# Altium PCB PCB1.PcbDoc
Units mm, origin at the board's own origin, x right, y up, seen from the top; angles counter-clockwise.
Board outline 93 x 20 mm, 2 copper layers (Top Layer, Bottom Layer); 36 components, 24 nets, 129 pads, 151 vias.
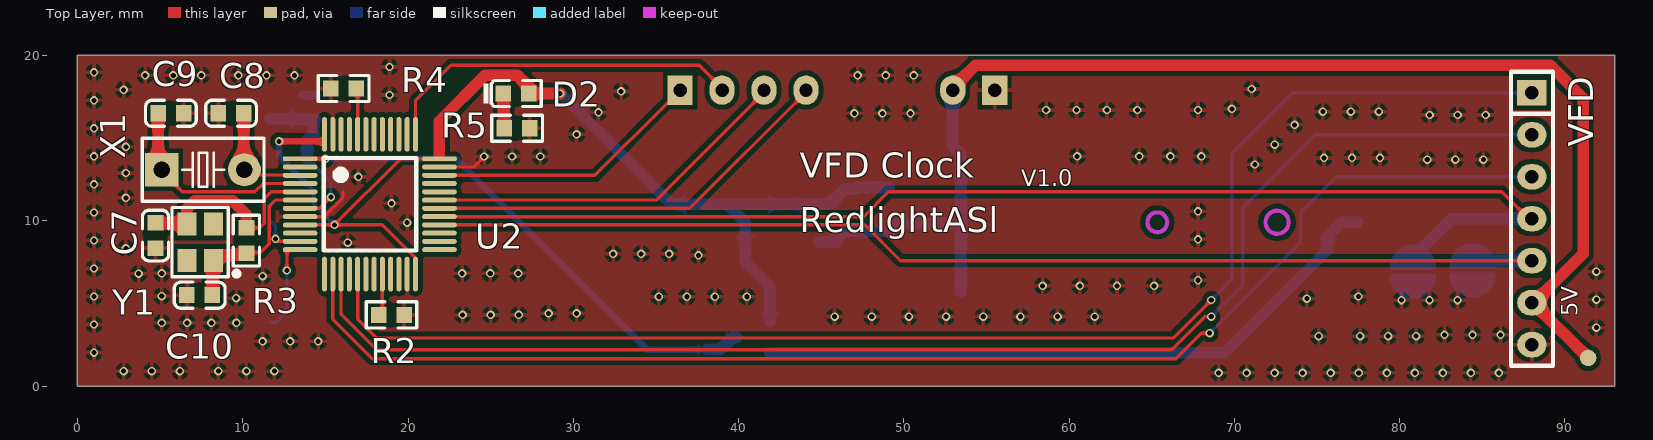
[diagram p0: Top Layer view]
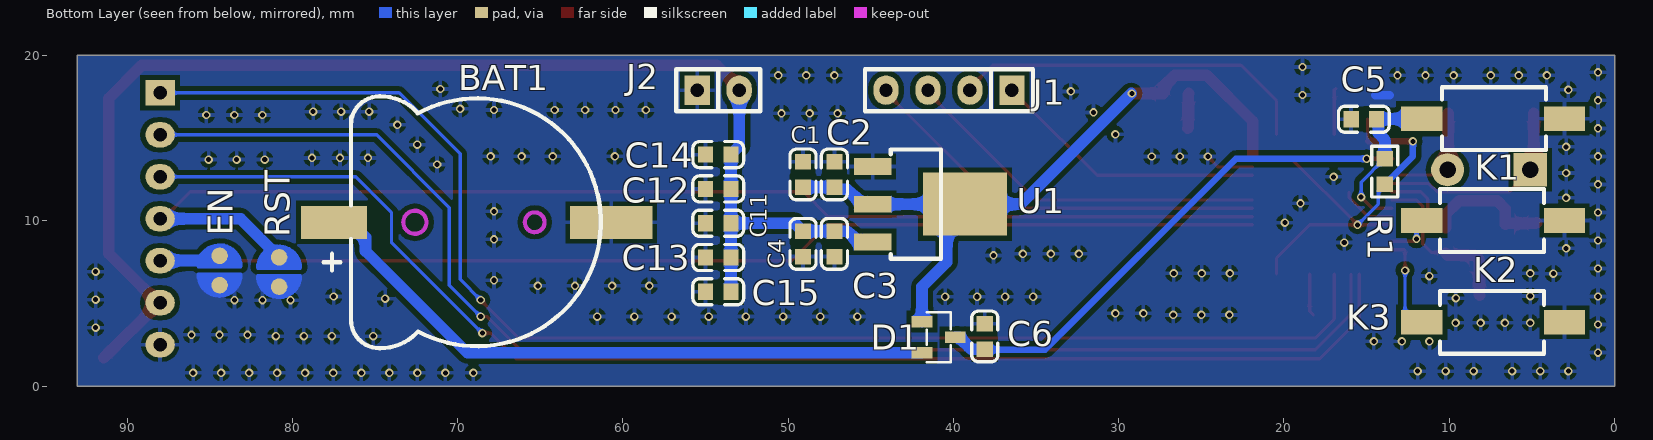
[diagram p1: Bottom Layer view, seen from below]
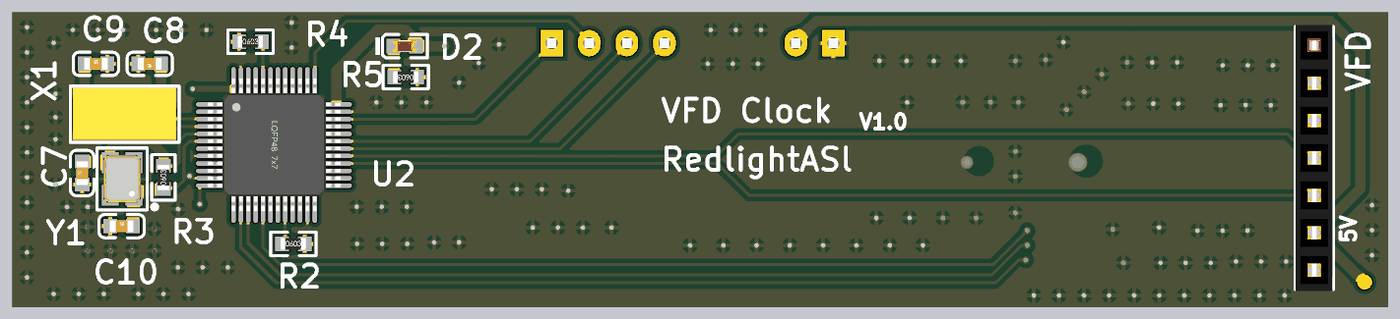
[diagram p2: 3D render of the assembled board from above, using the file's embedded part models]
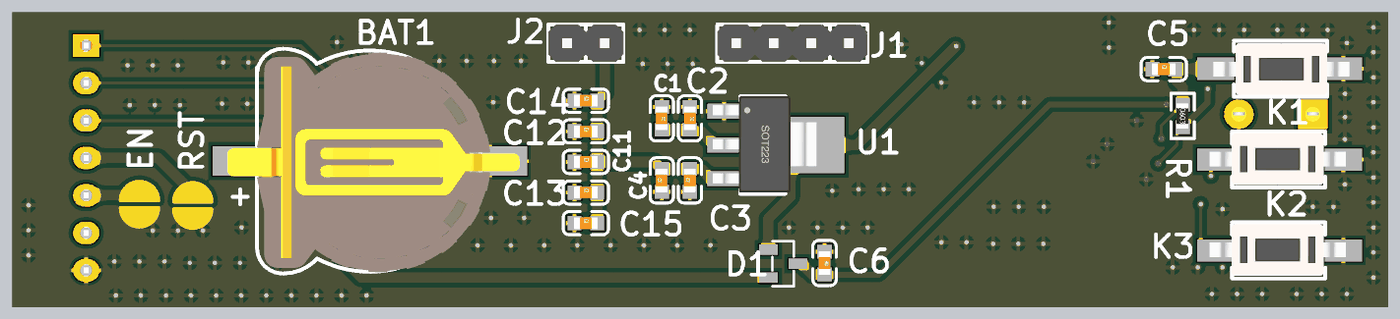
[diagram p3: 3D render of the assembled board from below, using the file's embedded part models]

## Layer stack, top to bottom
Top Solder: solder mask 0.0102, Solder Resist, Dk 3.5
Top Layer: signal copper 0.0356
Dielectric 1: dielectric 0.32, FR-4, Dk 4.8
Bottom Layer: signal copper 0.0356
Bottom Solder: solder mask 0.0102, Solder Resist, Dk 3.5

## Board outline
0,0 0,20 93,20 93,0

## Design rules (kind name [scope] priority, off if disabled: settings)
Clearance [All] p1: gap=0 ignorepadtopadclearanceinfootprint=FALSE except(0.3: Arc-Fill Arc-Poly Arc-Region Track-Fill Track-Poly Track-Region SMDPad-Fill SMDPad-Poly SMDPad-Region THPad-Fill THPad-Poly THPad-Region Via-Fill Via-Poly Via-Region Fill-Fill Fill-Poly Fill-Region Poly-Poly Poly-Region Region-Region)
PolygonConnect [All] p1: connectstyle=Relief reliefconductorwidth=0.254 reliefentries=4 polygonreliefangle="90 Angle" airgapwidth=0.254
RoutingVias [All] p1: holewidth=0.711 width=1.27 viastyle="Through Hole" minholewidth=0.711 minwidth=1.27 maxholewidth=0.711 maxwidth=1.27
SolderMaskExpansion [All] p1: expansion=0.102
Width [All] p1: maxlimit=40 minlimit=0.1 preferedwidth=0.2
30 further rules are at their usual default settings.

## Components (designator, comment, footprint, x,y, rotation, side; value= is the part's Value field where it differs from the comment)
5V "5V" "TEST 1" 91.4,1.7 r90 top (schematic designator TP1)
BAT1 "CR1220" CR1220-A 77.47,9.906 r0 bottom
C1 "100nF (104) 10% 50V" 0603_C 49.1,12.8 r270 bottom
C2 "10uF (106) 10% 10V" 0603_C 47.2,12.8 r270 bottom
C3 "10uF (106) 10% 10V" 0603_C 47.2,8.6 r90 bottom
C4 "100nF (104) 10% 50V" 0603_C 49.1,8.6 r90 bottom
C5 "100nF (104) 10% 50V" 0603_C 15.17,16.144 r180 bottom
C6 "100nF (104) 10% 50V" 0603_C 38.1,3 r270 bottom
C7 "22pF (220) 5% 50V" 0603_C 4.723,9.1 r90 top
C8 "15pF (150) 5% 50V" 0603_C 9.293,16.5 r180 top
C9 "15pF (150) 5% 50V" 0603_C 5.653,16.5 r0 top
C10 "22pF (220) 5% 50V" 0603_C 7.393,5.5 r0 top
C11 "1uF (105) 10% 50V" 0603_C 54.23,9.85 r180 bottom
C12 "1uF (105) 10% 50V" 0603_C 54.23,11.925 r180 bottom
C13 "1uF (105) 10% 50V" 0603_C 54.23,7.775 r180 bottom
C14 "1uF (105) 10% 50V" 0603_C 54.23,14 r180 bottom
C15 "1uF (105) 10% 50V" 0603_C 54.23,5.7 r180 bottom
D1 "BAT54C-KL3" BAT54C_KL3 39.9,2.95 r0 bottom
D2 "白灯 0603" 0603_LED_S1 26.53,17.7 r0 top
EN "DEBUG PAD" DEBUG_A#1 84.4,6.989 r90 bottom (schematic designator DE1)
J1 "Pin HDR1X4" "Pin HDR1X4/2.54mm-S" 36.46,17.9 r270 bottom
J2 "Pin HDR1X2" "Pin HDR1X2/2.54mm-S" 55.5,17.9 r90 bottom
K1 "KEY" SMD-3X6X5 3.032,16.172 r0 bottom
K2 "KEY" SMD-3X6X5 11.668,10.012 r180 bottom
K3 "KEY" SMD-3X6X5 11.668,3.853 r180 bottom
R1 "10KΩ (1002) ±1%" 0603_R 13.9,12.97 r270 bottom
R2 "10KΩ (1002) ±1%" 0603_R 19,4.3 r0 top
R3 "1MΩ (1004) ±1%" 0603_R 10.223,8.8 r90 top
R4 "10KΩ (1002) ±1%" 0603_R 16.1,18 r0 top
R5 "3.3KΩ (3301) ±1%" 0603_R 26.6,15.6 r180 top
RST "DEBUG PAD" DEBUG_A#2 80.8,6.9 r90 bottom (schematic designator DE2)
U1 "AMS1117" SOT223 44.888,11 r270 bottom
U2 "STM32F103C8T6" "LQFP48 7X7" 17.7,11 r270 top
VFD "Female HDR1X7" Fe-HDR1X7/2.54-S 88,17.74 r0 top (schematic designator "Female HDR1X2")
X1 "XTAL-2P 32.768k" "OSC 455E-LI" 7.6,13.085 r0 top
Y1 "8MHZ 12PF 10PPM" SMD-3225_4P 7.423,8.7 r90 top

## Footprints (in the part's own frame and the unit in brackets; to place one, negate y for a bottom-side part, rotate by r counter-clockwise, add the part's x,y. Pads: shape width x height; smd on the part's side, far side on the other; paste and mask are expansions set on the pad)
0603_C [mm]
  rect 0.93x0.98 smd: 1(-0.77,0) 2(0.77,0)
  silkscreen extent -1.53,-0.79 1.54,0.79, body extent -0.8,-0.4 0.8,0.4, height 0.3
0603_LED_S1 [mm]
  rect 0.93x0.98 smd: A(0.77,0) K(-0.77,0)
  silkscreen extent -1.98,-0.79 1.53,0.79, body extent -0.8,-0.4 0.8,0.4, height 0.6
0603_R [mm]
  rect 0.93x0.98 smd: 1(-0.77,0) 2(0.77,0)
  silkscreen extent -1.53,-0.79 1.54,0.79, body extent -0.85,-0.4 0.85,0.4, height 0.56
BAT54C_KL3 [mm]
  rect 1.25x0.7 smd: 1(2,-0.95) 2(2,0.95) 3(0,0)
  silkscreen extent 0.27,-1.53 1.73,1.53
CR1220-A [mm]
  rect 4x2 smd: 1(0,0)
  rect 5x2 smd: 2(-16.764,0)
  Keep-Out Layer circle w0.254: c-4.886,0 r0.7
  Keep-Out Layer circle w0.254: c-12.136,0 r0.6
  silkscreen extent -16.13,-7.62 0.64,7.62, body extent -18.77,-7.37 0.99,7.53, height 4.05
DEBUG_A#1 [mm] "调试断点焊盘"
  round 1 smd paste-1: 1(-0.889,0) 2(0.889,0)
  Top Layer region: -0.254,1.27 -0.254,-1.27 -0.762,-1.143 -1.397,-0.508 -1.524,0.254 -1.27,0.762 -1.016,1.016 -0.508,1.27
  Top Layer region: 0.254,1.27 0.254,-1.27 0.762,-1.143 1.397,-0.508 1.524,0.254 1.27,0.762 1.016,1.016 0.508,1.27
  Top Layer lines w0.254: -0.254,-1.27 cw(c-0.254,0) -0.978,-1.043 cw(c-0.254,0) -1.524,0 cw(c-0.254,0) -0.254,1.27 -0.254,-1.27 ; 0.254,-1.27 ccw(c0.254,0) 0.604,1.221 ccw(c0.254,0) 0.254,1.27 0.254,-1.27
DEBUG_A#2 [mm] "调试断点焊盘"
  round 1 smd paste-1: 1(-0.889,0) 2(0.889,0)
  Top Layer region: -0.254,1.27 -0.254,-1.27 -0.762,-1.143 -1.397,-0.508 -1.524,0.254 -1.27,0.762 -1.016,1.016 -0.508,1.27
  Top Layer region: 0.254,1.27 0.254,-1.27 0.762,-1.143 1.397,-0.508 1.524,0.254 1.27,0.762 1.016,1.016 0.508,1.27
  Top Layer lines w0.254: -0.254,-1.27 cw(c-0.254,0) -0.889,1.1 cw(c-0.254,0) -0.254,1.27 -0.254,-1.27 ; 0.254,-1.27 ccw(c0.254,0) 1.412,0.523 ccw(c0.254,0) 0.254,1.27 0.254,-1.27
Fe-HDR1X7/2.54-S [mil]
  rect 70x60 hole 32: 1(0,0)
  oval 70x60 hole 32: 2(0,-100) 3(0,-200) 4(0,-300) 5(0,-400) 6(0,-500) 7(0,-600)
  silkscreen extent -50,-650 50,50, body extent -49,-655 49,55, height 126
"LQFP48 7X7" [mm]
  oval 0.3x2.1 smd: 1(-2.75,-4.227) 2(-2.25,-4.227) 3(-1.75,-4.227) 4(-1.25,-4.227) 5(-0.75,-4.227) 6(-0.25,-4.227) 7(0.25,-4.227) 8(0.75,-4.227) 9(1.25,-4.227) 10(1.75,-4.227) 11(2.25,-4.227) 12(2.75,-4.227) 25(2.75,4.202) 26(2.25,4.202) 27(1.75,4.202) 28(1.25,4.202) 29(0.75,4.202) 30(0.25,4.202) 31(-0.25,4.202) 32(-0.75,4.202) 33(-1.25,4.202) 34(-1.75,4.202) 35(-2.25,4.202) 36(-2.75,4.202)
  oval 2.1x0.3 smd: 13(4.227,-2.75) 14(4.227,-2.25) 15(4.227,-1.75) 16(4.227,-1.25) 17(4.227,-0.75) 18(4.227,-0.25) 19(4.227,0.25) 20(4.227,0.75) 21(4.227,1.25) 22(4.227,1.75) 23(4.227,2.25) 24(4.227,2.75) 37(-4.227,2.75) 38(-4.227,2.25) 39(-4.227,1.75) 40(-4.227,1.25) 41(-4.227,0.75) 42(-4.227,0.25) 43(-4.227,-0.25) 44(-4.227,-0.75) 45(-4.227,-1.25) 46(-4.227,-1.75) 47(-4.227,-2.25) 48(-4.227,-2.75)
  silkscreen extent -2.79,-2.79 2.79,2.79, body extent -4.51,-4.5 4.5,4.5, height 1.45
"OSC 455E-LI" [mm]
  rect 2x2 hole 1 unplated: 1(-2.5,0)
  round 2 hole 1 unplated: 2(2.5,0)
  silkscreen extent -3.68,-1.91 3.68,1.91, body extent -3.5,-1.72 3.5,1.78, height 9.05
"Pin HDR1X2/2.54mm-S" [mil]
  rect 70x60 hole 32: 1(0,0)
  oval 70x60 hole 32: 2(0,-100)
  silkscreen extent -50,-150 50,50, body extent -50,-150 50,50, height 336
"Pin HDR1X4/2.54mm-S" [mil]
  rect 70x60 hole 32: 1(0,0)
  oval 70x60 hole 32: 2(0,-100) 3(0,-200) 4(0,-300)
  silkscreen extent -50,-350 50,50, body extent -50,-350 50,50, height 336
SMD-3X6X5 [mm]
  rect 2.5x1.5 smd: 1(0,0) 3(8.636,0)
  silkscreen extent 1.11,-1.9 7.41,1.9, body extent -0.41,-1.72 8.79,1.78, height 5.1
SMD-3225_4P [mm]
  rect 1.4x1.15 smd: 1(-1.1,-0.8) 2(1.1,-0.8) 3(1.1,0.8) 4(-1.1,0.8)
  silkscreen extent -2.1,-2.35 2.1,1.7, body extent -1.6,-1.25 1.6,1.25, height 0.61
SOT223 [mil]
  rect 40x90 smd: 1(-90,0) 2(0,0) 3(90,0)
  rect 150x200 smd: 2(0,220)
  silkscreen extent -130,43 130,163, body extent -130,-30 126,246, height 65
"TEST 1" [mm] "测试点1mm"
  round 1 smd paste-1: 1(0,0)

## Part data
5V: library part TEST, "测试点", 学习资源=www.oooc
C1 C4 C5 C6: library part "0603 100nF (104) 10% 50V", "贴片电容", Package=0603, SuppliersPartNumber=C14663, ComponentLink1Description=供应, ComponentLink1URL=http://www.szlcsc.com/product/details_15331.html, Supplier=LC
C2 C3: library part "0603 10uF (106) 10% 10V", "贴片电容", Package=0603, SuppliersPartNumber=C19702, ComponentLink1Description=供应, ComponentLink1URL=http://www.szlcsc.com/product/details_20411.html, Supplier=LC
C7 C10: library part "0603 22pF (220) 5% 50V", "贴片电容", Package=0603, SuppliersPartNumber=C1653, ComponentLink1Description=供应, ComponentLink1URL=http://www.szlcsc.com/product/details_2005.html, Supplier=LC
C8 C9: library part "0603 15pF (150) 5% 50V", "贴片电容", Package=0603, SuppliersPartNumber=C1644, ComponentLink1Description=供应, ComponentLink1URL=http://www.szlcsc.com/product/details_1996.html, Supplier=LC
C11 C12 C13 C14 C15: library part "0603 1uF (105) 10% 50V", "贴片电容", Package=0603, SuppliersPartNumber=C15849, ComponentLink1Description=供应, ComponentLink1URL=http://www.szlcsc.com/product/details_16531.html, Supplier=LC
D1: BOM_Manufacturer=ZRE, BOM_Manufacturer Part=BAT54C-KL3, BOM_Supplier=LCSC, BOM_Supplier Part=C779698, Contributor=LCSC, spicePre=D, spiceSymbolName=BAT54C-KL3
D2: library part "0603 白灯", "发光二极管", Package=0603, SuppliersPartNumber=C2290, ComponentLink1Description=供应, ComponentLink1URL=http://www.szlcsc.com/product/details_2663.html, Supplier=LC
EN RST: library part DEBUG, "调试断点焊盘"
R1 R2 R4: library part "0603 10KΩ (1002) 1%", "贴片电阻", Package=0603, SuppliersPartNumber=C25804, ComponentLink1Description=供应, ComponentLink1URL=http://www.szlcsc.com/product/details_26547.html, Supplier=LC
R3: library part "0603 1MΩ (1004) 1%", "贴片电阻", Package=0603, SuppliersPartNumber=C22935, ComponentLink1Description=供应, ComponentLink1URL=http://www.szlcsc.com/product/details_23662.html, Supplier=LC
R5: library part "0603 3.3KΩ (3301) 1%", "贴片电阻", Package=0603, SuppliersPartNumber=C22978, ComponentLink1Description=供应, ComponentLink1URL=http://www.szlcsc.com/product/details_23705.html, Supplier=LC
U1: "三端稳压芯片"
X1: library part XTAL-2P, "2脚无源脚晶振"
Y1: library part "SMD-3225_4P  25MHZ 12PF 10PPM", "贴片晶振", Package=SMD-3225_4P, SuppliersPartNumber=C9006, ComponentLink1Description=供应, ComponentLink1URL=http://www.szlcsc.com/product/details_9526.html, Supplier=LC

## Via types
v1: diameter 0.508, hole 0.305, Top Layer to Bottom Layer, tented both sides, 151 vias

## Nets (pads, with @x,y where several pads share a name; then routed paths per layer and width w, separated by ;. In a path a pad name is that pad's centre, name@x,y a point inside that pad or via, vN(x,y) a via of type N, cw(c..) or ccw(c..) an arc to the next point about the centre after c; other vN are vias at no path point)
3.3V: C1.2 C2.2 D1.1 D2.A R1.2 U1.2 U2.9 U2.24 U2.36 U2.48 | length 69.7
  Top Layer w0.2: U2.9 v1(15.55,9.75) ; U2.48@14.904,14.8 14.95,14.846 U2.48 U2.48@14.95,16.15 ; U2.24 20.45,7.75 18.45,9.75 v1(15.55,9.75) ; U2.36 19.55,13.75 v1(15.55,9.75) ; D2.A D2.A@27.3,17.725
  Top Layer w0.4: v1(12.2,14.8) U2.48@14.904,14.8
  Top Layer w0.7: 21.902,14.002 21.902,16.032 24.67,18.8 26.6,18.8 27.3,18.1 D2.A@27.3,17.725 ; D2.A v1(29.2,17.7)
  Bottom Layer w0.2: R1.2 13.925,12.2 14.29,11.835 14.29,11.01 v1(15.55,9.75)
  Bottom Layer w0.4: v1(12.2,14.8) 12.2,13.9 13.51,12.59 13.51,12.565 13.875,12.2 R1.2
  Bottom Layer w0.7: v1@29.24,17.7 35.94,11 U1.2@39.3,11 ; D1.1 41.9,6 40.4,7.5 40.4,9.9 U1.2@39.3,11 ; C1.2 C2.2 47.085,11.915 46.438,11.915 45.523,11 44.888,11 U1.2@39.3,11
+5: 5V.1 C3.2 C4.2 C11.2 C12.2 C13.2 C14.2 C15.2 J2.2 U1.3 VFD.6 | length 79.5
  Top Layer w0.7: J2.2 52.96,18.027 54.333,19.4 89.1,19.4 91.1,17.4 91.1,8.013 VFD.6@88.127,5.04 ; VFD.6 88.06,5.04 5V.1
  Bottom Layer w0.7: U1.3 45.765,8.714 46.421,9.37 C3.2 C4.2 49.125,9.37 49.605,9.85 C11.2 ; J2.2 52.96,14.525 53.46,14.025 C14.2 C12.2 C15.2
EN: EN.2 U2.28 VFD.5 | length 70.7
  Top Layer w0.2: U2.28 47.628,9.75 49.798,7.58 VFD.5
  Bottom Layer w0.7: EN.2 84.481,7.878 84.766,7.593 85.621,7.593 87.987,7.593 VFD.5
ENTER: K3.1 U2.12 | length 5.8
  Top Layer w0.2: v1(12.673,6.991) 12.673,8.204 12.719,8.25 U2.12
  Bottom Layer w0.2: K3.1 12.023,3.853 12.673,4.503 v1(12.673,6.991)
GND: BAT1.2 C1.1 C2.1 C3.1 C4.1 C5.1 C6.1 C7.1 C8.2 C9.2 C10.1 C11.1 C12.1 C13.1 C14.1 C15.1 EN.1 J2.1 K1.1 K2.3 K3.3 R2.2 R4.1 R5.1 RST.1 U1.1 U2.8 U2.23 U2.35 U2.47 VFD.7 | length 7.2
  Top Layer w0.2: U2.8 14.911,10.25 16.061,11.4 16.061,11.72 ; U2.35 23.973,13.25 v1(24.609,13.887)
  Bottom Layer w0.5: 13.6,17.6 14.484,17.6
  other v1: 69.046,0.8 70.742,0.8 72.437,0.8 74.133,0.8 75.828,0.8 77.523,0.8 79.219,0.8 80.914,0.8 82.609,0.8 84.305,0.8 86,0.8 2.8,0.9 4.495,0.9 6.191,0.9 8.523,0.9 10.218,0.9 11.914,0.9 1,2.023 11.2,2.7 12.872,2.7 14.567,2.7 75.102,3.016 77.609,3.012 79.305,3.012 81,3.012 82.709,3.1 84.405,3.1 86.1,3.1 91.9,3.527 1,3.719 5.1,3.821 6.634,3.821 8.1,3.821 9.613,3.821 45.809,4.2 48.058,4.2 50.307,4.2 52.556,4.2 54.805,4.2 57.053,4.2 59.302,4.2 61.551,4.2 23.309,4.3 25.005,4.3 26.7,4.3 28.509,4.4 30.205,4.4 80.109,5.197 81.805,5.197 83.5,5.197 91.9,5.223 74.379,5.286 9.6,5.314 1,5.414 35.179,5.4 36.874,5.4 38.57,5.4 40.501,5.4 77.5,5.414 5.1,5.441 58.4,6.06 60.649,6.06 62.898,6.06 65.147,6.06 67.8,6.4 11.208,6.652 3.7,6.8 5.1,6.814 23.28,6.814 24.976,6.814 26.671,6.814 91.9,6.918 1,7.109 37.578,7.9 32.409,7.998 34.105,7.998 35.8,7.998 2.927,8.33 16.354,8.678 1,8.805 67.8,8.872 19.95,9.887 1,10.5 67.8,10.567 19,11.056 2.927,11.387 1,12.195 17,12.659 2.927,12.887 71.242,13.402 81.668,13.7 83.363,13.7 85.059,13.7 75.421,13.8 77.117,13.8 78.812,13.8 1,13.891 26.305,13.887 28,13.887 60.487,13.897 64.244,13.897 66.122,13.897 68,13.897 2.927,14.473 72.441,14.601 30.2,15.228 1,15.586 73.64,15.8 81.809,16.4 83.505,16.4 85.2,16.4 47.009,16.5 48.705,16.5 50.4,16.5 31.526,16.553 75.349,16.6 77.045,16.6 78.74,16.6 58.609,16.698 60.447,16.698 62.286,16.698 64.124,16.698 67.8,16.698 69.847,16.769 1,17.281 18.883,17.605 32.9,17.823 2.8,17.92 71.046,17.967 4.1,18.8 5.795,18.8 7.491,18.8 9.74,18.8 11.435,18.8 13.13,18.8 47.209,18.8 48.905,18.8 50.6,18.8 1,18.977 18.883,19.3
MODE: K2.1 U2.11 | length 2.8
  Top Layer w0.2: v1(11.982,8.9) 12.123,8.759 13.464,8.759 U2.11
  Bottom Layer w0.2: K2.1 11.982,9.699 v1(11.982,8.9)
NetBAT1_1: BAT1.1 D1.2 | length 39.3
  Bottom Layer w0.7: D1.2 69.4,2 75.57,8.17 75.57,9.006 76.47,9.906 BAT1.1
NetC7_2: C7.2 R3.2 U2.5 Y1.3 | length 12.8
  Top Layer w0.2: R3.2 11.02,9.57 11.3,9.85 11.3,11.318 11.732,11.75 U2.5
  Top Layer w0.7: C7.2 4.758,9.835 6.588,9.835 Y1.3 6.623,10.723 7.1,11.2 9.4,11.2 10.223,10.377 R3.2
NetC8_1: C8.1 U2.3 X1.2 | length 7
  Top Layer w0.2: X1.2@9.991,13.113 10.335,12.769 13.454,12.769 U2.3
  Top Layer w0.7: X1.2@9.991,13.113 10.063,13.186 C8.1
NetC9_1: C9.1 U2.4 X1.1 | length 12.7
  Top Layer w0.2: X1.1@4.883,13.302 X1.1 ; X1.1@5.06,13.044 6.354,11.75 10.736,11.75 11.236,12.25 U2.4
  Top Layer w0.7: X1.1@4.883,13.302 C9.1
NetC10_2: C10.2 R3.1 U2.6 Y1.1 | length 10.3
  Top Layer w0.2: R3.1 10.276,8.083 11.083,8.083 11.6,8.6 11.6,10.868 11.982,11.25 U2.6
  Top Layer w0.7: C10.2 8.193,5.53 8.193,7.57 Y1.1 8.223,7.69 8.448,7.915 10.108,7.915 R3.1
NetD2_K: D2.K R5.2 | length 2.1
  Top Layer w0.7: D2.K 25.795,17.665 25.795,15.635 R5.2
NetR2_1: R2.1 U2.20 | length 2.6
  Top Layer w0.2: R2.1 18.45,4.52 U2.20
NetR4_2: R4.2 U2.44 | length 2.8
  Top Layer w0.2: R4.2 16.95,17.92 U2.44
RESET: RST.2 U2.29 VFD.4 | length 75.6
  Top Layer w0.2: U2.29 47.569,10.25 49.069,11.75 86.167,11.75 87.797,10.12 VFD.4
  Bottom Layer w0.7: RST.2 81.323,8.312 83.131,10.12 VFD.4
RST: C5.2 K1.3 R1.1 U2.7 | length 10.4
  Top Layer w0.2: U2.7 14.654,10.75 v1(15.334,11.43)
  Bottom Layer w0.2: R1.1 13.925,13.74 15.334,12.331 v1(15.334,11.43)
  Bottom Layer w0.7: K1.3 11.682,16.158 14.386,16.158 C5.2 14.285,16.029 14.285,15.285 13.9,14.9 R1.1
SPI1_MOSI: U2.17 VFD.1 | length 84.8
  Top Layer w0.2: U2.17 16.95,4.05 18.1,2.9 66.298,2.9 v1(68.6,5.202)
  Bottom Layer w0.2: v1(68.6,5.202) 69.847,6.449 69.847,14.047 73.54,17.74 VFD.1
SPI1_NSS: U2.14 VFD.3 | length 81.9
  Top Layer w0.2: U2.14 15.45,4.05 17.85,1.65 66.45,1.65 68,3.2 v1(68.5,3.2)
  Bottom Layer w0.2: v1(68.5,3.2) 74,8.7 74,10.5 76.16,12.66 VFD.3
SPI1_SCLK: U2.15 VFD.2 | length 83.5
  Top Layer w0.2: U2.15 15.95,4.35 18.1,2.2 66.2,2.2 68.2,4.2 v1(68.6,4.2)
  Bottom Layer w0.2: v1(68.6,4.2) 70.5,6.1 70.5,10.8 74.9,15.2 VFD.2
SWCLK: J1.2 U2.37 | length 22.2
  Top Layer w0.2: U2.37 20.45,17.25 22.6,19.4 37.627,19.4 39,18.027 J1.2
SWDIO: J1.1 U2.34 | length 16.8
  Top Layer w0.2: U2.34 31.31,12.75 35.671,17.111 35.798,17.111 36.46,17.773 J1.1
USART1_RX: J1.3 U2.31 | length 22.5
  Top Layer w0.2: U2.31 35.017,11.25 41.54,17.773 J1.3
USART1_TX: J1.4 U2.30 | length 25.2
  Top Layer w0.2: U2.30 37.057,10.75 44.08,17.773 J1.4
VBAT: C6.2 D1.3 U2.1 | length 31.5
  Top Layer w0.3: U2.1 v1(15,13.75)
  Bottom Layer w0.4: v1(15,13.75) 22.903,13.75 34.453,2.2 38.07,2.2 C6.2
  Bottom Layer w0.7: C6.2 38.93,2.23 39.65,2.95 D1.3
pads on no net: U2.2 U2.10 U2.13 U2.16 U2.18 U2.19 U2.21 U2.22 U2.25 U2.26 U2.27 U2.32 U2.33 U2.38 U2.39 U2.40 U2.41 U2.42 U2.43 U2.45 U2.46 Y1.2 Y1.4

## Polygon pours and split planes (outlines as drawn)
GND on Top Layer "Top Layer-GND" (solid, remove dead copper, pour order 2): 0,20 0,0 93,0 93,20
GND on Bottom Layer "Bottom Layer-GND" (solid, remove dead copper, pour order 4): 0,0 93,0 93,20 0,20

## Silkscreen, mask and mechanical layers (free items; w line width, h text height)
Top Overlay:
  text "VFD Clock" at 43.7,12.6 h1.52
  text "V1.0" at 57.1,12.1 h1
  text "RedlightASl" at 43.7,9.3 h1.52
Mechanical 1:
  the board outline again, w0.254